# Altium PCB main.PcbDoc (part 2 of 2)
Units mm, origin at the board's own origin, x right, y up, seen from the top; angles counter-clockwise.
Board outline 40.5 x 55.75 mm, 4 copper layers (Top Layer, Int1, Int2, Bottom Layer), stack 1.334 mm thick; 84 components, 154 nets, 493 pads, 303 vias.
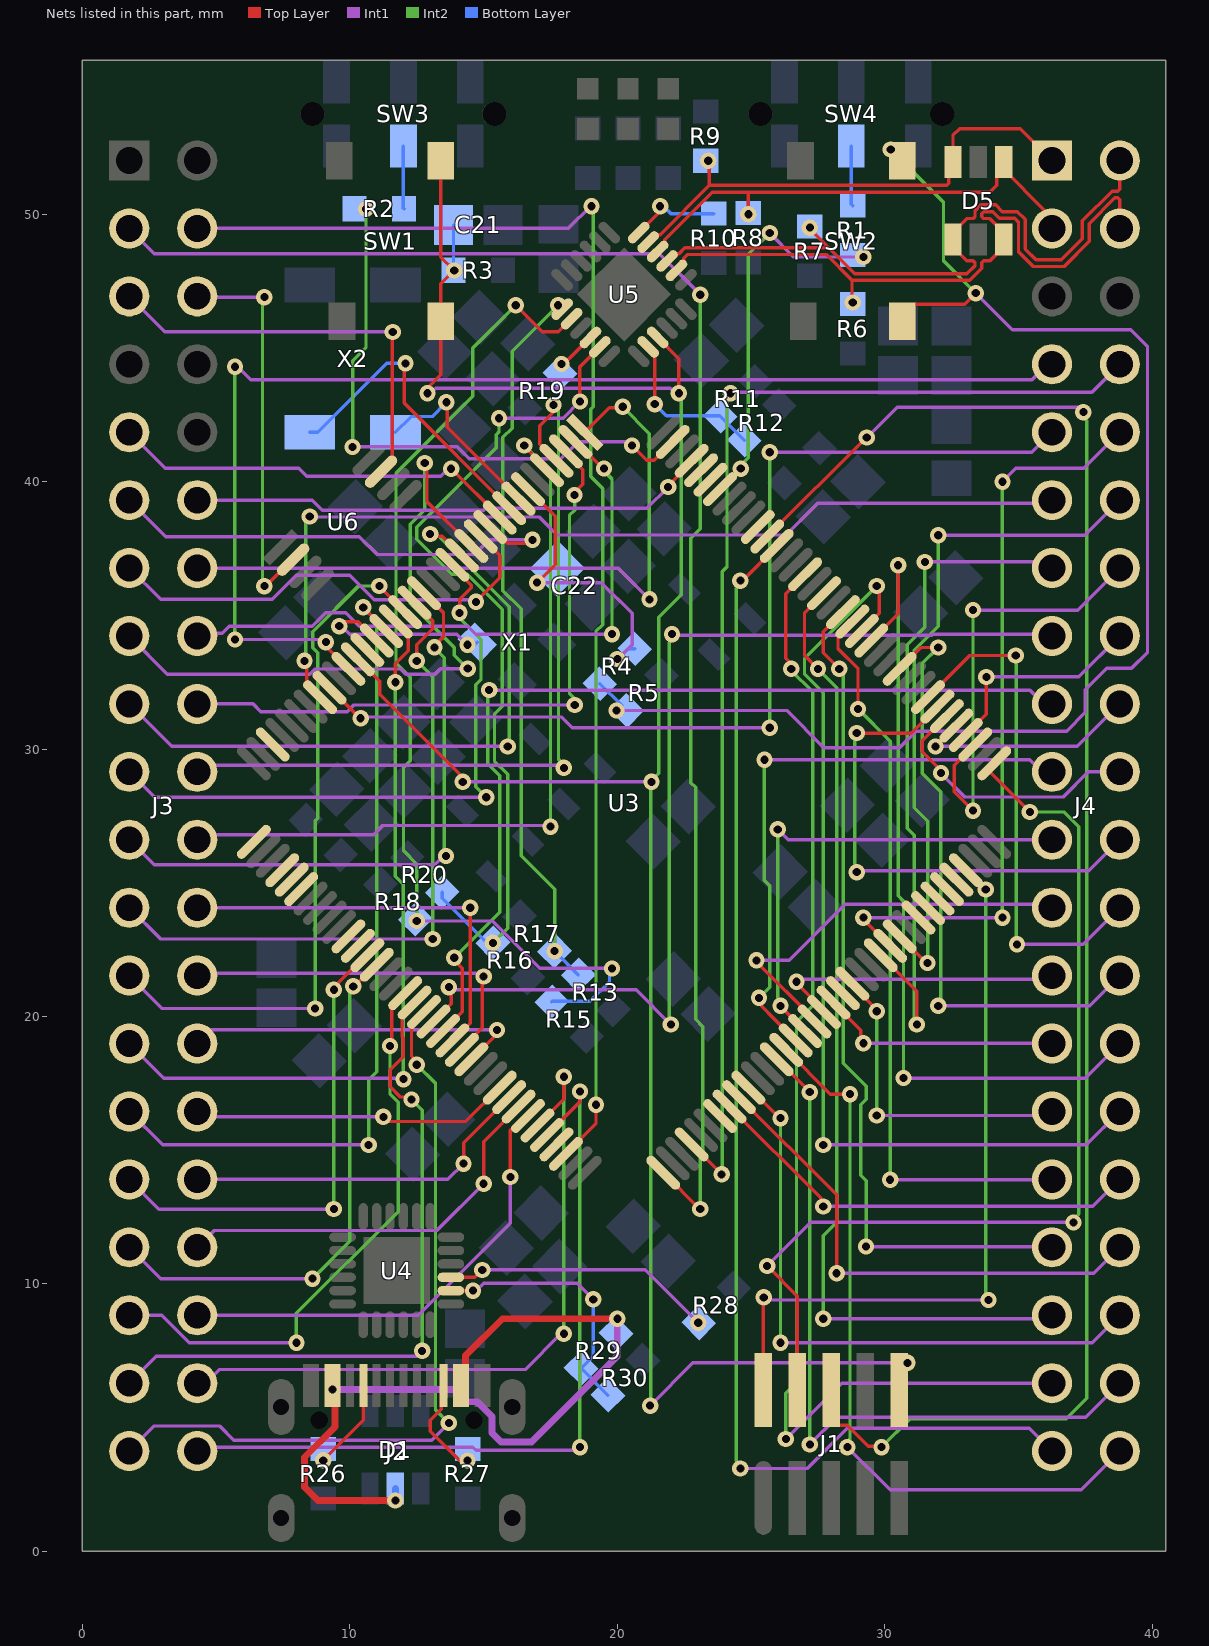
[diagram p4: the nets of this part, all layers, seen from the top]

## Via types
v1: diameter 0.61, hole 0.305, Top Layer to Bottom Layer, tented both sides, 302 vias
v2: diameter 1.5, hole 1, Top Layer to Bottom Layer, 1 vias

## Nets (pads, with @x,y where several pads share a name; then routed paths per layer and width w, separated by ;. In a path a pad name is that pad's centre, name@x,y a point inside that pad or via, vN(x,y) a via of type N, cw(c..) or ccw(c..) an arc to the next point about the centre after c; other vN are vias at no path point) (continued)
NetJ2_A5: J2.A5 R26.1 | length 3.4
  Top Layer w0.127: v1(9,3.405) 10.5,4.905 J2.A5@10.5,6.2
NetJ2_B5: J2.B5 R27.2 | length 3.8
  Top Layer w0.127: J2.B5@13.5,6.2 13.413,6.114 13.413,5.313 13,4.9 13,4.5 14.1,3.4 v1(14.4,3.4)
NetR1_1: R1.1 U3.138 | length 14.2
  Top Layer w0.127: U3.138@23.839,39.72 23.843,39.72 24.609,40.487 v1(24.613,40.487) v1@24.626,40.5
  Int1 w0.127: v1(25.7,49.3) 26.6,48.4 v1(29.2,48.4)
  Int2 w0.127: v1(24.613,40.487) 24.613,40.614 24.9,40.901 24.9,48.5 v1(25.7,49.3)
NetR1_2: R1.2 SW4.5 | length 2.2
  Bottom Layer w0.127: SW4.5@28.75,52.55 28.75,50.375 R1.2@28.8,50.325
NetR2_1: R2.1 U3.143 | length 22.1
  Top Layer w0.127: v1(20.546,41.355) 21.1,40.8 21.383,40.8 U3.143@22.071,41.488
  Int1 w0.127: v1(10.1,41.3) 14.02,41.3 14.46,40.859 17.889,40.859 18.53,41.5 20.4,41.5 v1(20.546,41.355)
  Int2 w0.127: v1(10.1,41.3) 10.1,44.515 10.6,45.015 v1(10.6,50.2)
NetR2_2: R2.2 SW3.5 | length 2.4
  Bottom Layer w0.127: SW3.5@12,52.55 12,50.225 R2.2@12.025,50.2
NetR4_2: R4.2 R5.2 SW2.2 | length 53.2
  Top Layer w0.127: v1(30.225,52.425) SW2.2@30.65,52 ; SW2.2@30.65,46 30.65,46.2 31.087,46.637 32.987,46.637 v1(33.4,47.05)
  Int1 w0.127: v1(19.971,31.446) 26.329,31.446 27.725,30.05 30.55,30.05 31.175,30.675 36.8,30.675 37.5,31.375 37.5,32.225 38.3,33.025 39.225,33.025 39.825,33.625 39.825,45.05 39.2,45.675 34.775,45.675 v1(33.4,47.05)
  Int2 w0.127: v1(30.225,52.425) 32.195,50.455 32.195,48.255 v1(33.4,47.05)
  Bottom Layer w0.127: R4.2@19.346,32.446 R5.2@20.158,31.633 ; v1(19.971,31.446) R5.2@20.346,31.446
NetR10_2: R10.2 U5.24 | length 3.4
  Top Layer w0.127: U5.24@20.798,49.316 21.6,50.118 v1(21.6,50.3)
  Bottom Layer w0.127: v1(21.6,50.3) 21.731,50.3 22.006,50.025 R10.2@23.6,50.025
NetR11_2: R11.2 R12.1 U5.14 | length 6.2
  Top Layer w0.127: U5.14@21.152,45.038 21.4,44.789 21.393,44.783 21.393,42.907 v1(21.4,42.9)
  Bottom Layer w0.127: v1(21.4,42.9) 21.836,42.464 23.828,42.464 R11.2@23.846,42.446 R12.1@24.746,41.546
NetR13_1: R13.1 R17.2 U5.7 | length 27.3
  Top Layer w0.127: v1(17.786,46.6) U5.7@17.934,46.452
  Int2 w0.127: v1(17.654,22.446) 17.654,24.761 16.4,26.015 16.4,35.243 15.721,35.922 15.721,41.655 16.07,42.005 16.07,44.884 v1(17.786,46.6)
  Bottom Layer w0.127: v1(17.654,22.446) R13.1@18.546,21.554
NetR15_1: R15.1 R18.2 U5.8 | length 39.2
  Top Layer w0.127: v1(16.2,46.6) 17.2,45.6 17.789,45.6 U5.8@18.288,46.098
  Int1 w0.127: v1(12.5,23.575) 15.328,23.575 17.103,21.8 v1(19.8,21.8)
  Int2 w0.127: v1(12.5,23.575) 12.5,25.7 12.005,26.195 12.005,29.316 12.254,29.565 12.254,32.686 11.725,33.215 11.725,40.325 14.6,43.2 14.6,45 v1(16.2,46.6)
  Bottom Layer w0.127: R18.2@12.454,23.646 12.5,23.6 v1(12.5,23.575) ; R15.1@17.546,20.554 17.564,20.572 18.972,20.572 19.708,21.308 19.708,21.708 v1(19.8,21.8)
NetR16_1: R16.1 R20.2 U5.11 | length 31.6
  Top Layer w0.127: v1(18.6,43) 18.6,44.289 U5.11@19.348,45.038
  Int1 w0.127: v1(15.575,42.375) 17.975,42.375 v1(18.6,43)
  Int2 w0.127: v1(15.346,22.754) 15.9,23.308 15.9,29.059 15.405,29.555 15.405,31.31 15.702,31.607 15.702,35.223 14.393,36.532 13.814,36.532 12.505,37.841 12.505,38.305 15.467,41.267 15.467,41.76 15.575,41.868 v1(15.575,42.375)
  Bottom Layer w0.127: R20.2@13.454,24.646 13.454,24.415 15.115,22.754 v1(15.346,22.754)
NetR19_2: R19.2 U5.10 | length 1.5
  Top Layer w0.127: v1(17.909,44.4) 18.004,44.4 U5.10@18.995,45.391
NetR28_2: R28.2 U4.9 | length 10.2
  Top Layer w0.127: U4.9@13.775,10.25 14.675,10.25 v1(14.95,10.525)
  Int1 w0.127: v1(14.95,10.525) 21.05,10.525 v1(23.025,8.55)
NetR29_2: R29.2 R30.1 U4.8 | length 9.9
  Top Layer w0.127: U4.8@13.775,9.75 v1(14.6,9.75)
  Int1 w0.127: v1(14.6,9.75) 14.731,9.75 15.006,10.025 18.5,10.025 v1(19.1,9.425)
  Bottom Layer w0.127: v1(19.1,9.425) 19.1,7.3 R29.2@18.646,6.846 R30.1@19.646,5.846
NRST: C21.1 J1.10 R3.1 SW1.2 U3.25 U5.15 | length 85
  Top Layer w0.127: U3.25@10.297,33.356 11.115,32.539 11.115,32.06 14.129,29.046 14.129,28.863 v1(14.217,28.775) ; v1(12.9,43.305) 12.9,43.5 13.4,44 SW1.2@13.4,46 13.4,47.4 v1(13.9,47.9) 13.4,48.4 SW1.2@13.4,52 ; U5.15@21.505,45.391 22.3,44.596 v1(22.3,43.305)
  Int1 w0.127: v1(12.9,43.305) 13.025,43.305 13.216,43.495 21.979,43.495 22.169,43.305 v1(22.3,43.305) ; v1(14.217,28.775) v1(21.275,28.775) ; v1(21.225,5.45) 22.825,7.05 v1(30.85,7.05)
  Int2 w0.127: v1(21.225,5.45) 21.25,5.475 21.25,28.7 21.225,28.725 v1(21.275,28.775) 21.275,28.816 21.55,29.091 21.55,34.925 22.395,35.77 22.395,42.989 22.392,42.992 22.392,43.212 v1(22.3,43.305)
  Bottom Layer w0.127: C21.1@13.875,49.6 13.875,47.925 v1(13.9,47.9)
OSC32_IN: U3.8 X2.4 | length 7.4
  Top Layer w0.127: v1@13.481,43.175 13.606,43.05 v1(13.606,42.969) ; v1@13.646,43.009 13.646,42.028 U3.8@16.308,39.367
  Bottom Layer w0.127: X2.4@11.7,41.85 12.287,42.437 13.074,42.437 v1(13.606,42.969)
OSC32_OUT: U3.9 X2.1 | length 11.7
  Top Layer w0.127: v1(12.081,44.425) 12.025,44.369 12.025,42.943 U3.9@15.954,39.013
  Bottom Layer w0.127: X2.1@8.5,41.85 8.8,41.85 11.375,44.425 v1(12.081,44.425)
OSC_IN: U3.23 X1.3 | length 7.5
  Top Layer w0.127: v1(9.6,34.6) 9.762,34.762 10.306,34.762 U3.23@11.005,34.063
  Int1 w0.127: v1(9.6,34.6) 9.701,34.6 10.001,34.3 14,34.3 v1(14.4,33.9)
  Bottom Layer w0.127: v1@14.2,33.9 v1(14.4,33.9) 14.51,33.9 14.588,33.822 X1.3@14.765,34
OSC_OUT: U3.24
PA0: U3.34
PA3: U3.37
PA4: U3.40
PA5: U3.41
PA6: U3.42
PB1: U3.47
PB2: U3.48
PB4: U3.134
PB8: U3.139
PB9: U3.140
PB10: U3.69
PB11: J3.4 U3.70 | length 51.3
  Top Layer w0.127: U3.70@18.076,14.865 19.2,15.99 v1(19.2,16.7)
  Int1 w0.127: J3.4@4.29,49.47 18.17,49.47 19,50.3 v1(19.031,50.3)
  Int2 w0.127: v1(19.031,50.3) 19.092,50.238 19.092,49.992 19.1,49.984 19.1,42.8 19.005,42.704 19.005,40.195 19.454,39.746 19.454,34.654 19.2,34.4 v1(19.2,16.7)
PB12: J3.3 U3.73 | length 58.9
  Top Layer w0.127: U3.73@21.717,14.158 21.729,14.158 23.088,12.8 v1(23.1,12.8)
  Int1 w0.127: J3.3@1.75,49.47 2.691,48.529 21.571,48.529 23.1,47 v1(23.1,46.989)
  Int2 w0.127: v1(23.1,12.8) 23.1,14.845 23.195,14.941 23.195,19.621 22.926,19.891 22.926,28.571 22.751,28.746 22.751,37.885 23.1,38.234 v1(23.1,46.989)
PB15: J4.8 U3.76 | length 45.9
  Top Layer w0.127: U3.76@22.778,15.219 23.897,14.1 v1(23.9,14.1)
  Int1 w0.127: v1(24.234,43.305) 24.279,43.349 37.749,43.349 J4.8@38.79,44.39
  Int2 w0.127: v1(23.9,14.1) 23.916,14.116 23.916,36.641 24.1,36.825 24.1,43.04 24.234,43.174 v1(24.234,43.305)
PC0: J4.7 U3.26 | length 46
  Top Layer w0.127: v1(9.1,34) 9.1,33.847 U3.26@9.944,33.003
  Int1 w0.127: v1(5.7,34.1) 9,34.1 v1(9.1,34) ; v1(5.705,44.3) 5.8,44.3 6.295,43.805 35.505,43.805 36.091,44.39 J4.7@36.25,44.39
  Int2 w0.127: v1(5.7,34.1) 5.7,44.2 5.705,44.205 v1(5.705,44.3)
PC2: J4.9 U3.28 | length 38.3
  Top Layer w0.127: U3.28@9.237,32.296 10.378,31.155 v1(10.4,31.155)
  Int1 w0.127: v1(10.4,31.155) 10.445,31.2 17.915,31.2 18.315,30.8 v1(25.7,30.8) ; v1(25.7,41.1) 35.5,41.1 J4.9@36.25,41.85
  Int2 w0.127: v1(25.7,30.8) v1(25.7,41.1)
PC3: J4.11 U3.29 | length 35.7
  Top Layer w0.127: v1(8.3,33.3) 8.381,33.219 8.381,32.444 U3.29@8.883,31.942
  Int1 w0.127: v1(8.5,38.7) 8.519,38.68 17.074,38.68 17.75,38.005 26.304,38.005 27.5,39.2 36.14,39.2 J4.11@36.25,39.31
  Int2 w0.127: v1(8.3,33.3) 8.351,33.351 8.351,38.551 v1(8.5,38.7)
PC6: J4.13 U3.96 | length 25.7
  Top Layer w0.127: U3.96@29.849,22.29 31.2,20.939 v1(31.2,19.7)
  Int1 w0.127: v1(31.5,37) 36.02,37 J4.13@36.25,36.77
  Int2 w0.127: v1(31.2,19.7) 31.108,19.792 31.108,20.013 31.105,20.016 31.105,26.781 30.846,27.04 30.846,33.896 31.5,34.55 v1(31.5,37)
PC7: J4.10 U3.97 | length 28.1
  Top Layer w0.127: v1(29.2,23.7) 29.2,23.646 U3.97@30.203,22.644
  Int1 w0.127: v1(29.2,23.7) v1(34.4,23.7) ; v1(34.4,40) 34.905,40.505 37.445,40.505 J4.10@38.79,41.85
  Int2 w0.127: v1(34.4,23.7) v1(34.4,40)
PC8: J4.12 U3.98 | length 25.4
  Top Layer w0.127: U3.98@30.556,22.997 30.579,22.997 31.577,22 v1(31.6,22)
  Int1 w0.127: v1(32,38) 37.48,38 J4.12@38.79,39.31
  Int2 w0.127: v1(31.6,22) 31.6,27.3 31.1,27.8 31.1,33.7 32,34.6 v1(32,38)
PC10: J4.14 U3.111 | length 16.7
  Top Layer w0.127: v1(33.3,27.7) 32.6,28.4 32.6,29.39 U3.111@33.385,30.174
  Int1 w0.127: v1(33.3,35.2) 37.22,35.2 J4.14@38.79,36.77
  Int2 w0.127: v1(33.3,27.7) v1(33.3,35.2)
PC11: J4.16 U3.112 | length 8.1
  Top Layer w0.127: U3.112@33.031,30.528 33.8,31.297 v1(33.8,32.7)
  Int1 w0.127: v1(33.8,32.7) 37.26,32.7 J4.16@38.79,34.23
PC12: J4.18 U3.113 | length 8.7
  Top Layer w0.127: v1(31.9,30.1) 31.9,30.102 32.677,30.879 U3.113@32.677,30.881
  Int1 w0.127: v1(31.9,30.1) 37.2,30.1 J4.18@38.79,31.69
PD0: J4.20 U3.114 | length 10.2
  Top Layer w0.127: v1(32.1,29.105) 32,29.205 32,29.3 31.405,29.895 31.405,30.316 U3.114@32.324,31.235
  Int1 w0.127: v1(32.1,29.105) 32.995,28.209 36.669,28.209 37.61,29.15 J4.20@38.79,29.15
PD1: J4.22 U3.115 | length 19
  Top Layer w0.127: v1(28.949,30.6) 30.982,30.6 U3.115@31.97,31.589
  Int1 w0.127: v1(28.949,25.4) 29.001,25.452 37.632,25.452 J4.22@38.79,26.61
  Int2 w0.127: v1(28.949,25.4) 28.875,25.475 28.875,30.525 v1(28.949,30.6)
PD2: J4.24 U3.116 | length 19.2
  Top Layer w0.127: U3.116@31.617,31.942 33.175,33.5 v1(34.9,33.5)
  Int1 w0.127: v1(34.945,22.7) 37.42,22.7 J4.24@38.79,24.07
  Int2 w0.127: v1(34.9,33.5) 34.923,33.477 34.923,22.723 v1(34.945,22.7)
PD5: J4.26 U3.119 | length 23
  Top Layer w0.127: U3.119@30.556,33.003 31.353,33.8 v1(32,33.8)
  Int1 w0.127: v1(32,20.4) 37.66,20.4 J4.26@38.79,21.53
  Int2 w0.127: v1(32,20.4) 32.095,20.495 32.095,28.405 31.405,29.095 31.405,33.205 v1(32,33.8)
PD6: J4.28 U3.122 | length 31.1
  Top Layer w0.127: U3.122@29.495,34.063 30.5,35.068 v1(30.5,36.875)
  Int1 w0.127: v1(30.7,17.7) 37.5,17.7 J4.28@38.79,18.99
  Int2 w0.127: v1(30.5,36.875) 30.5,24.515 30.7,24.315 v1(30.7,17.7)
PD7: J4.30 U3.123 | length 35.9
  Top Layer w0.127: U3.123@29.142,34.417 29.8,35.075 29.8,35.869 29.7,35.969 v1(29.7,36.1)
  Int1 w0.127: v1(27.7,15.2) 37.54,15.2 J4.30@38.79,16.45
  Int2 w0.127: v1(27.7,15.2) 27.7,32.1 27,32.8 27,33.4 v1(29.7,36.1)
PD11: J4.32 U3.80 | length 16.7
  Top Layer w0.127: U3.80@24.192,16.633 27.608,13.218 27.608,12.992 v1(27.7,12.9)
  Int1 w0.127: v1(27.7,12.9) 37.78,12.9 J4.32@38.79,13.91
PD12: J4.34 U3.81 | length 19.1
  Top Layer w0.127: U3.81@24.546,16.987 28.2,13.332 v1(28.2,10.4)
  Int1 w0.127: v1(28.2,10.4) 37.82,10.4 J4.34@38.79,11.37
PD13: J4.36 U3.82 | length 23.2
  Top Layer w0.127: U3.82@24.899,17.34 24.929,17.34 26.07,16.2 v1(26.1,16.2)
  Int1 w0.127: v1(26.1,7.8) 37.76,7.8 J4.36@38.79,8.83
  Int2 w0.127: v1(26.1,7.8) v1(26.1,16.2)
PD14: J4.38 U3.85 | length 27.5
  Top Layer w0.127: U3.85@25.96,18.401 25.979,18.401 27.18,17.2 27.18,17.187 v1(27.195,17.172)
  Int1 w0.127: v1(27.2,4) 28.214,5.014 37.514,5.014 J4.38@38.79,6.29
  Int2 w0.127: v1(27.195,17.172) 27.198,17.17 27.198,4.002 v1(27.2,4)
PD15: J4.40 U3.86 | length 27.8
  Top Layer w0.127: U3.86@26.313,18.755 27.968,17.1 v1(28.7,17.1)
  Int1 w0.127: v1(28.6,3.9) 30.2,2.3 37.34,2.3 J4.40@38.79,3.75
  Int2 w0.127: v1(28.6,3.9) 28.692,3.992 28.692,4.208 28.7,4.216 v1(28.7,17.1)
PE0: J3.12 U3.141 | length 19.5
  Top Layer w0.127: v1(21.9,39.8) 21.9,39.852 22.778,40.729 U3.141@22.778,40.781
  Int1 w0.127: J3.12@4.29,39.31 8.59,39.31 8.966,38.934 15,38.934 15.07,39.005 21.105,39.005 v1(21.9,39.8)
PE2: J3.14 U3.1 | length 26.8
  Top Layer w0.127: U3.1@18.783,41.842 19.705,42.764 20.164,42.764 v1(20.2,42.8)
  Int1 w0.127: J3.14@4.29,36.77 20.03,36.77 v1(21.2,35.6)
  Int2 w0.127: v1(20.2,42.8) 21.2,41.8 v1(21.2,35.6)
PE3: J3.16 U3.2 | length 24
  Top Layer w0.127: U3.2@18.429,41.488 18.468,41.488 19.461,40.495 v1(19.5,40.495)
  Int1 w0.127: J3.16@4.29,34.23 4.391,34.331 5.231,34.331 5.495,34.595 8.595,34.595 9.1,35.1 9.85,35.1 10.35,34.6 14.4,34.6 14.7,34.3 v1(19.8,34.3)
  Int2 w0.127: v1(19.5,40.495) 19.5,40.4 19.8,40.1 v1(19.8,34.3)
PE4: J3.18 U3.3 | length 24.4
  Top Layer w0.127: U3.3@18.076,41.135 18.076,41.074 18.7,40.45 18.7,39.9 18.4,39.6 v1(18.4,39.5)
  Int1 w0.127: J3.18@4.29,31.69 6.376,31.69 6.67,31.396 9.896,31.396 10.15,31.65 v1(18.405,31.65)
  Int2 w0.127: v1(18.4,39.5) 18.4,38.927 18.209,38.737 18.209,32.091 18.45,31.85 18.405,31.805 v1(18.405,31.65)
PE5: J3.20 U3.4 | length 30.3
  Top Layer w0.127: v1(17.609,42.87) 17.691,42.789 17.691,42.691 17.1,42.1 17.1,41.4 17.719,40.781 U3.4@17.722,40.781
  Int1 w0.127: J3.20@4.29,29.15 4.535,29.395 17.905,29.395 v1(18,29.3)
  Int2 w0.127: v1(17.609,42.87) 17.726,42.87 17.8,42.796 17.8,29.616 18,29.416 v1(18,29.3)
PE6: J3.22 U3.5 | length 29.4
  Top Layer w0.127: v1(16.517,41.355) 16.517,41.317 17.369,40.465 U3.5@17.369,40.427
  Int1 w0.127: J3.22@4.29,26.61 4.475,26.795 10.887,26.795 11.237,27.145 17.455,27.145 v1(17.5,27.1)
  Int2 w0.127: v1(16.517,41.355) 17.5,40.371 v1(17.5,27.1)
PE7: J3.24 U3.58 | length 15.5
  Top Layer w0.127: U3.58@13.833,19.108 13.854,19.108 14.5,19.754 v1(14.5,24.07)
  Int1 w0.127: J3.24@4.29,24.07 v1(14.5,24.07)
PE8: J3.26 U3.59 | length 13.9
  Top Layer w0.127: U3.59@14.187,18.755 14.187,18.815 14.747,19.376 14.955,19.584 14.955,21.455 v1(15,21.5)
  Int1 w0.127: J3.26@4.29,21.53 4.384,21.624 14.745,21.624 14.869,21.5 v1(15,21.5)
PE9: J3.28 U3.60 | length 13.2
  Top Layer w0.127: U3.60@14.54,18.401 15.408,19.269 15.408,19.408 v1(15.5,19.5)
  Int1 w0.127: J3.28@4.29,18.99 4.29,19.5 v1(15.5,19.5)
PE10: J3.30 U3.63 | length 12
  Top Layer w0.127: v1(11.25,16.25) 11.423,16.077 14.337,16.077 U3.63@15.601,17.34
  Int1 w0.127: J3.30@4.29,16.45 4.49,16.25 v1(11.25,16.25)
PE11: J3.32 U3.64 | length 13.4
  Top Layer w0.127: v1(14.25,14.5) 14.25,15.282 U3.64@15.954,16.987
  Int1 w0.127: J3.32@4.29,13.91 13.66,13.91 v1(14.25,14.5)
PE12: J3.34 U3.65 | length 15.1
  Top Layer w0.127: v1(15,13.75) 15,15.325 U3.65@16.308,16.633
  Int1 w0.127: J3.34@4.29,11.37 4.92,12 13.25,12 v1(15,13.75)
PE13: J3.36 U3.66 | length 17.5
  Top Layer w0.127: v1(16,14) 16,15.75 16.027,15.777 16.159,15.777 U3.66@16.661,16.28
  Int1 w0.127: J3.36@4.29,8.83 12.555,8.83 16,12.275 v1(16,14)
PE14: J3.38 U3.67 | length 26.3
  Top Layer w0.127: U3.67@17.015,15.926 18,16.911 v1(18,17.75)
  Int1 w0.127: J3.38@4.29,6.29 4.598,6.29 5.109,6.801 16.551,6.801 17.891,8.141 v1(18,8.141)
  Int2 w0.127: v1(18,8.141) v1(18,17.75)
PE15: J3.40 U3.68 | length 29.9
  Top Layer w0.127: U3.68@17.369,15.573 18.6,16.804 v1(18.6,17.2)
  Int1 w0.127: J3.40@4.29,3.75 4.44,3.9 14.6,3.9 14.722,3.778 18.348,3.778 18.469,3.9 v1(18.6,3.9)
  Int2 w0.127: v1(18.6,3.9) v1(18.6,17.2)
PF0: J3.9 U3.10 | length 15.4
  Top Layer w0.127: v1(13.784,40.484) 13.797,40.484 15.601,38.679 U3.10@15.601,38.66
  Int1 w0.127: J3.9@1.75,41.85 3.1,40.5 8.089,40.5 8.385,40.205 13.395,40.205 13.676,40.486 13.678,40.484 v1(13.784,40.484)
PF1: J3.11 U3.11 | length 18
  Top Layer w0.127: U3.11@15.247,38.306 15.287,38.306 15.893,37.7 16.584,37.7 16.714,37.83 16.72,37.825 v1(16.825,37.825)
  Int1 w0.127: J3.11@1.75,39.31 3.115,37.945 10.353,37.945 11.02,37.279 14.663,37.279 15.209,37.825 v1(16.825,37.825)
PF2: J3.13 U3.12 | length 17.3
  Top Layer w0.127: v1(14.711,35.507) 14.711,35.511 15.6,36.4 15.6,37.246 U3.12@14.894,37.953
  Int1 w0.127: J3.13@1.75,36.77 2.92,35.6 7.1,35.6 8,36.5 10,36.5 10.91,35.591 14.627,35.591 v1(14.711,35.507)
PF3: J3.15 U3.13 | length 26.1
  Top Layer w0.127: v1(12.8,40.7) 12.881,40.62 12.881,39.259 U3.13@14.54,37.599
  Int1 w0.127: J3.15@1.75,34.23 3.175,32.805 8.505,32.805 8.696,32.995 11.905,32.995 12.096,32.805 13.182,32.805 13.387,33.01 v1(14.405,33.01)
  Int2 w0.127: v1@12.8,40.7 12.8,38.959 12.251,38.41 12.251,35.45 13.9,33.8 13.9,33.514 v1(14.405,33.01)
PF4: J3.17 U3.14 | length 25.7
  Top Layer w0.127: v1(13,38.046) 13.092,37.954 13.459,37.954 14.167,37.245 U3.14@14.187,37.245
  Int1 w0.127: J3.17@1.75,31.69 3.34,30.1 v1(15.9,30.1)
  Int2 w0.127: v1(13,38.046) 13.092,37.954 13.331,37.954 15.956,35.328 15.956,30.156 v1(15.9,30.1)
PF5: J3.19 U3.15 | length 23.5
  Top Layer w0.127: U3.15@13.833,36.892 13.833,36.832 14.394,36.271 14.53,36.135 14.53,36.03 14.1,35.6 v1(14.1,35.095)
  Int1 w0.127: J3.19@1.75,29.15 2.7,28.2 v1(15.1,28.2)
  Int2 w0.127: v1(14.1,35.095) 14.1,34.9 14.9,34.1 14.9,32.6 14.712,32.412 14.712,28.588 v1(15.1,28.2)
PF6: J3.21 U3.18 | length 22.8
  Top Layer w0.127: U3.18@12.772,35.831 13.5,35.104 13.5,34.2 13.161,33.861 v1(13.161,33.805)
  Int1 w0.127: J3.21@1.75,26.61 2.691,25.669 13.17,25.669 13.5,26 v1(13.595,26)
  Int2 w0.127: v1(13.161,33.805) 13.161,33.789 13.53,33.42 13.53,26.066 v1(13.595,26)
PF7: J3.23 U3.19 | length 25.2
  Top Layer w0.127: U3.19@12.419,35.478 13.1,34.796 13.1,34.5 12.5,33.9 v1(12.5,33.3)
  Int1 w0.127: J3.23@1.75,24.07 2.92,22.9 v1(13.1,22.9)
  Int2 w0.127: v1(12.5,33.3) 13.1,32.7 v1(13.1,22.9)
PF8: J3.25 U3.20 | length 26.2
  Top Layer w0.127: v1(11.1,36.1) 11.1,36.094 12.065,35.129 U3.20@12.065,35.124
  Int1 w0.127: J3.25@1.75,21.53 2.98,20.3 v1(8.7,20.3)
  Int2 w0.127: v1(8.7,20.3) 8.7,27.316 8.795,27.411 8.795,33.604 8.605,33.795 8.605,34.384 10.321,36.1 v1(11.1,36.1)
PF9: J3.27 U3.21 | length 28.4
  Top Layer w0.127: v1(11.7,32.5) 11.7,33.2 12.183,33.684 12.183,34.299 U3.21@11.712,34.771
  Int1 w0.127: J3.27@1.75,18.99 3.04,17.7 11.959,17.7 v1(12,17.659)
  Int2 w0.127: v1(11.7,32.5) 11.7,25.253 12,24.953 v1(12,17.659)
PF10: J3.29 U3.22 | length 31.1
  Top Layer w0.127: v1(10.5,35.3) 10.5,35.288 11.358,34.429 U3.22@11.358,34.417
  Int1 w0.127: J3.29@1.75,16.45 3,15.2 v1(10.7,15.2)
  Int2 w0.127: v1(10.5,35.3) 11,34.8 11,17.939 10.7,17.639 v1(10.7,15.2)
PF11: J3.31 U3.49 | length 18.2
  Top Layer w0.127: v1(9.4,21) 9.4,21.104 9.92,21.624 9.925,21.624 10.591,22.29 U3.49@10.651,22.29
  Int1 w0.127: J3.31@1.75,13.91 2.86,12.8 v1(9.4,12.8)
  Int2 w0.127: v1(9.4,12.8) v1(9.4,21)
PF12: J3.33 U3.50 | length 20.1
  Top Layer w0.127: v1(10.125,21.129) 10.161,21.129 10.969,21.937 U3.50@11.005,21.937
  Int1 w0.127: J3.33@1.75,11.37 2.92,10.2 v1(8.6,10.2)
  Int2 w0.127: v1(8.6,10.2) 10,11.6 10,20.9 10.047,20.947 10.047,21.051 v1(10.125,21.129)
PF13: J3.35 U3.53 | length 21.7
  Top Layer w0.127: v1(11.5,18.9) 11.563,18.963 11.563,20.374 U3.53@12.065,20.876
  Int1 w0.127: J3.35@1.75,8.83 2.96,8.83 3.99,7.8 v1(8,7.8)
  Int2 w0.127: v1(8,7.8) 8,8.9 11.8,12.7 11.8,16.8 11.5,17.1 v1(11.5,18.9)
PF14: J3.37 U3.54 | length 25.6
  Top Layer w0.127: v1(12.3,16.9) 12.208,16.992 11.882,16.992 11.505,17.37 11.505,18.005 12,18.5 12,19.203 11.947,19.256 11.947,20.051 U3.54@12.419,20.522
  Int1 w0.127: J3.37@1.75,6.29 2.763,7.303 12.503,7.303 v1(12.7,7.5)
  Int2 w0.127: v1(12.3,16.9) 12.7,16.5 v1(12.7,7.5)
PF15: J3.39 U3.55 | length 29
  Top Layer w0.127: v1(12.5,18.2) 12.5,18.331 12.301,18.53 12.301,19.697 U3.55@12.772,20.169
  Int1 w0.127: J3.39@1.75,3.75 2.691,4.691 5.124,4.691 5.655,4.159 13.059,4.159 v1(13.7,4.8)
  Int2 w0.127: v1(12.5,18.2) 13.2,17.5 13.2,5.3 v1(13.7,4.8)
PG0: J4.15 U3.56 | length 39.4
  Top Layer w0.127: U3.56@13.126,19.815 13.792,20.482 13.792,21.008 v1(13.7,21.1)
  Int1 w0.127: v1(13.7,21.1) 13.8,21 20.7,21 v1(22,19.7) ; v1(22.045,34.3) 22.091,34.255 31.754,34.255 31.795,34.295 36.185,34.295 J4.15@36.25,34.23
  Int2 w0.127: v1(22,19.7) 21.935,19.765 21.935,33.984 21.953,34.002 21.953,34.208 v1(22.045,34.3)
PG1: J4.17 U3.57 | length 35.3
  Top Layer w0.127: U3.57@13.479,19.462 14.2,20.182 14.2,21.8 13.9,22.1 v1(13.9,22.2)
  Int1 w0.127: v1(15.207,32.207) 15.214,32.2 35.43,32.2 35.94,31.69 J4.17@36.25,31.69
  Int2 w0.127: v1(13.9,22.2) 15.6,23.9 15.6,29 15.151,29.449 15.151,32.151 v1(15.207,32.207)
PG2: J4.19 U3.87 | length 22.2
  Top Layer w0.127: v1(25.3,20.7) 25.392,20.608 25.392,20.383 25.866,19.909 U3.87@26.667,19.108
  Int1 w0.127: v1(25.5,29.6) 35.428,29.6 35.878,29.15 J4.19@36.25,29.15
  Int2 w0.127: v1(25.3,20.7) 25.695,21.095 25.695,24.894 25.5,25.09 v1(25.5,29.6)
PG3: J4.21 U3.88 | length 18.4
  Top Layer w0.127: v1(26.1,20.4) 26.1,20.391 27.021,19.471 U3.88@27.021,19.462
  Int1 w0.127: v1(26,27) 26.39,26.61 J4.21@36.25,26.61
  Int2 w0.127: v1(26,27) 26,20.5 v1(26.1,20.4)
PG4: J4.23 U3.89 | length 15.2
  Top Layer w0.127: v1(25.2,22.1) 25.2,22.045 27.374,19.871 U3.89@27.374,19.815
  Int1 w0.127: v1(25.2,22.1) 26.425,22.1 28.52,24.195 36.125,24.195 J4.23@36.25,24.07
PG5: J4.25 U3.90 | length 11.2
  Top Layer w0.127: v1(26.7,21.3) 26.7,21.248 27.728,20.221 U3.90@27.728,20.169
  Int1 w0.127: v1(26.7,21.3) 26.793,21.393 36.113,21.393 J4.25@36.25,21.53
PG6: J4.27 U3.91 | length 9
  Top Layer w0.127: U3.91@28.081,20.522 29.108,19.495 29.108,19.092 v1(29.2,19)
  Int1 w0.127: v1(29.2,19) 36.24,19 J4.27@36.25,18.99
PG8: J4.29 U3.93 | length 11.9
  Top Layer w0.127: U3.93@28.788,21.229 28.788,21.171 29.7,20.259 v1(29.7,20.2)
  Int1 w0.127: v1(29.7,16.3) 36.1,16.3 J4.29@36.25,16.45
  Int2 w0.127: v1(29.7,16.3) v1(29.7,20.2)
PG9: J4.31 U3.124 | length 28
  Top Layer w0.127: U3.124@28.788,34.771 28.788,34.71 28.25,34.172 28.25,33.75 29,33 v1(29,31.5)
  Int1 w0.127: v1(30.2,13.9) 36.24,13.9 J4.31@36.25,13.91
  Int2 w0.127: v1(29,31.5) 30.2,30.3 v1(30.2,13.9)
PG10: J4.33 U3.125 | length 31.8
  Top Layer w0.127: v1(28.3,33) 27.7,33.6 27.7,34.389 U3.125@28.435,35.124
  Int1 w0.127: v1(29.3,11.4) 29.315,11.385 36.205,11.385 36.22,11.4 J4.33@36.25,11.37
  Int2 w0.127: v1(28.3,33) 28.354,32.946 28.38,32.946 28.454,32.872 28.454,18.246 29.3,17.4 29.3,16.9 29.1,16.7 29.1,14.065 29.3,13.865 v1(29.3,11.4)
PG12: J4.35 U3.127 | length 36.7
  Top Layer w0.127: v1(27.5,33) 27,33.5 27,35.104 U3.127@27.728,35.831
  Int1 w0.127: v1(27.7,8.7) 36.12,8.7 J4.35@36.25,8.83
  Int2 w0.127: v1(27.5,33) 28.2,32.3 28.2,12.3 27.7,11.8 v1(27.7,8.7)
PG14: J4.37 U3.129 | length 44.3
  Top Layer w0.127: v1(26.505,33) 26.505,33.105 26.55,33.15 26.3,33.4 26.3,35.818 U3.129@27.021,36.538
  Int1 w0.127: v1(26.3,4.2) 28.39,6.29 J4.37@36.25,6.29
  Int2 w0.127: v1(26.3,4.2) 26.3,5.915 26.7,6.315 26.7,19.8 27.3,20.4 27.3,32.141 26.505,32.936 v1(26.505,33)
PG15: J4.39 U3.132 | length 47.9
  Top Layer w0.127: v1(24.6,36.3) 24.68,36.3 25.96,37.579 U3.132@25.96,37.599
  Int1 w0.127: v1(24.6,3.1) 27.1,3.1 28.6,4.6 35.4,4.6 J4.39@36.25,3.75
  Int2 w0.127: v1(24.6,3.1) 24.6,3.231 24.451,3.38 24.451,36.02 24.6,36.169 v1(24.6,36.3)
RD_N: D5.4 J4.3 R8.1 U5.22 | length 18.8
  Top Layer w0.127: U5.22@21.505,48.609 21.778,48.881 21.778,49.055 23.548,50.826 24.9,50.826 ; v1(24.9,50) 24.9,50.826 ; J4.3@36.25,49.47 35.987,49.733 35.987,50.138 34.45,51.675 D5.4@34.45,51.95 34.188,51.688 34.188,51.088 33.926,50.826 24.9,50.826
RD_P: D5.6 J4.1 R9.1 U5.23 | length 19.2
  Top Layer w0.127: U5.23@21.152,48.962 21.424,49.235 21.598,49.235 23.443,51.08 ; v1(23.4,52) 23.443,51.957 23.443,51.08 ; J4.1@36.25,52.01 35.06,53.2 32.8,53.2 32.55,52.95 D5.6@32.55,51.95 32.395,51.795 32.395,51.154 32.32,51.08 23.443,51.08
SCLOUT: J3.6 U6.2 | length 14.9
  Top Layer w0.127: v1(6.8,36.095) 6.843,36.095 7.833,37.086 U6.2@7.876,37.086
  Int1 w0.127: J3.6@4.29,46.93 4.32,46.9 v1(6.8,46.9)
  Int2 w0.127: v1(6.8,36.095) 6.73,36.166 6.73,46.83 v1(6.8,46.9)
SDAOUT: J3.5 U6.7 | length 15.8
  Top Layer w0.127: U6.7@11.164,40.374 11.585,40.795 11.585,45.585 v1(11.6,45.6)
  Int1 w0.127: J3.5@1.75,46.93 3.08,45.6 v1(11.6,45.6)
SWCLK: J1.4 U3.109 | length 36.7
  Top Layer w0.127: v1(25.6,10.675) 26.73,9.545 J1.4@26.73,6.04 ; U3.109@34.092,29.467 33.923,29.298 33.923,29.152 v1(35.425,27.65)
  Int1 w0.127: v1(25.6,10.675) 27.236,12.311 37.044,12.311 v1(37.055,12.3)
  Int2 w0.127: v1(35.425,27.65) 36.7,27.65 37.25,27.1 37.25,12.616 37.055,12.42 v1(37.055,12.3)
SWDIO: J1.2 U3.105 | length 28.3
  Top Layer w0.127: J1.2@25.46,6.04 25.46,9.485 v1(25.475,9.5) ; U3.105@33.031,25.472 33.042,25.472 33.764,24.75 v1(33.775,24.75)
  Int1 w0.127: v1(25.475,9.5) 25.575,9.4 v1(33.875,9.4)
  Int2 w0.127: v1(33.775,24.75) 33.775,9.5 v1(33.875,9.4)
SWO: J1.6 U3.133 | length 62.6
  Top Layer w0.127: U3.133@25.606,37.953 29.304,41.65 v1(29.325,41.65) ; J1.6@28,6.04 28,4.985 28.262,4.724 28.591,4.724 29.38,3.935 29.84,3.935 v1(29.875,3.9)
  Int1 w0.127: v1(29.325,41.65) 30.466,42.791 37.235,42.791 v1(37.425,42.6)
  Int2 w0.127: v1(29.875,3.9) 30.925,4.95 36.775,4.95 37.55,5.725 37.55,42.284 37.517,42.317 37.517,42.508 v1(37.425,42.6)
TD_N: D5.3 J4.4 R6.1 U5.20 | length 25.4
  Top Layer w0.127: U5.20@22.212,47.902 22.485,48.174 22.485,48.348 22.634,48.497 27.803,48.497 28.774,47.526 ; v1(28.8,46.7) 28.774,46.726 28.774,47.526 ; J4.4@38.79,49.47 38.79,50.539 38.716,50.613 38.603,50.613 37.643,49.653 37.643,48.983 36.705,48.046 35.549,48.046 35,48.595 35,49.7 34.854,49.846 34.288,49.846 34.04,50.095 33.701,50.095 33.627,50.02 33.627,49.915 33.701,49.841 33.934,49.841 34.45,49.325 D5.3@34.45,49.05 34.45,48.775 33.934,48.259 33.701,48.259 33.627,48.185 33.627,47.975 33.178,47.526 28.774,47.526
TD_P: D5.1 J4.2 R7.1 U5.21 | length 25.8
  Top Layer w0.127: U5.21@21.859,48.255 22.131,48.528 22.305,48.528 22.528,48.751 27.908,48.751 ; v1(27.2,49.5) 27.2,49.459 27.908,48.751 ; J4.2@38.79,52.01 38.79,50.941 38.716,50.867 38.498,50.867 37.389,49.758 37.389,49.089 36.6,48.3 35.654,48.3 35.254,48.7 35.254,49.805 34.959,50.1 34.393,50.1 34.145,50.349 33.596,50.349 33.373,50.125 33.373,49.915 33.299,49.841 33.065,49.841 32.55,49.325 D5.1@32.55,49.05 32.55,48.775 33.065,48.259 33.299,48.259 33.373,48.185 33.373,48.08 33.073,47.78 28.88,47.78 27.908,48.751
USB_OTG_FS_DM: U3.103
USB_OTG_FS_DP: U3.104
USB_OTG_FS_ID: U3.102
USB_OTG_FS_OVCR: U3.92
USB_OTG_FS_PWR_EN: U3.79
USB_OTG_FS_SOF: U3.100
USB_OTG_FS_VBUS: U3.101
USR_BTN: C22.2 R4.1 U3.7 | length 11
  Top Layer w0.127: U3.7@16.661,39.72 17.672,38.709 17.672,36.897 v1(17,36.225)
  Int1 w0.127: v1(17,36.225) 19.4,36.225 20.55,35.075 20.55,33.9 20.02,33.37 v1(20,33.37)
  Bottom Layer w0.127: v1(20,33.37) 20.384,33.754 R4.1@20.654,33.754
VBUS: D1.5 J2.A4/B9 J2.A9/B4 R29.1 | length 30.2
  Top Layer w0.254: v1(9.35,6.05) 9.439,5.961 9.439,4.66 8.3,3.521 8.3,2.4 8.8,1.9 v1(11.7,1.9) ; J2.A9/B4@14.15,6.2 14.323,6.373 14.323,7.323 15.7,8.7 v1(20,8.7)
  Int1 w0.254: v1(9.35,6.05) 13.929,6.05 14.384,5.595 14.764,5.595 15.316,5.043 15.316,4.429 15.649,4.096 16.796,4.096 20,7.3 v1(20,8.7)
  Bottom Layer w0.254: v1(11.7,1.9) D1.5@11.7,2.35
pads on no net: D1.4 D1.6 J1.1 J1.7 J1.8 J2. J2.A8 J2.B8 SW3. SW3.1 SW3.2 SW3.3 SW4. SW4.1 SW4.2 SW4.3 U4.1 U4.5 U4.10 U4.11 U4.12 U4.13 U4.14 U4.15 U4.16 U4.17 U4.18 U4.19 U4.22 U4.23 U4.24 U5.4 X1.1

## Polygon pours and split planes (outlines as drawn)
3V3 on Top Layer "3V3_L01_P000" (solid, remove dead copper, pour order 0): 0,55.75 0,0 40.5,0 40.5,55.75
GND on Bottom Layer "GND_L04_P001" (solid, remove dead copper, pour order 1): 0,55.75 0,0 40.5,0 40.5,55.75

## Silkscreen, mask and mechanical layers (free items; w line width, h text height)
Top Overlay:
  text "1 <-> 0" at 9.25,54.441 h0.81
  text "1 <-> 0" at 26,54.441 h0.81
  text "A" at 2.025,53 h2
  text "B" at 36.65,53 h2
  text "BOOT0" at 26.75,52.941 h0.81
  text "PDR_ON" at 9.5,52.874 h0.81
  text "NRST" at 8.676,47.5 h0.81 r90
  text "USR_BTN" at 25.951,46.3 h0.81 r90
  text "D" at 36.55,0.4 h2
  text "C" at 2.075,0.3 h2
Mechanical 1:
  the board outline again, w0.25